# Altium PCB UltiController.PcbDoc (part 2 of 2)
Units mm, origin at the board's own origin, x right, y up, seen from the top; angles counter-clockwise.
Board outline 170 x 47 mm, 2 copper layers (Top Layer, Bottom Layer), stack 1.58 mm thick; 138 components, 71 nets, 382 pads, 231 vias.
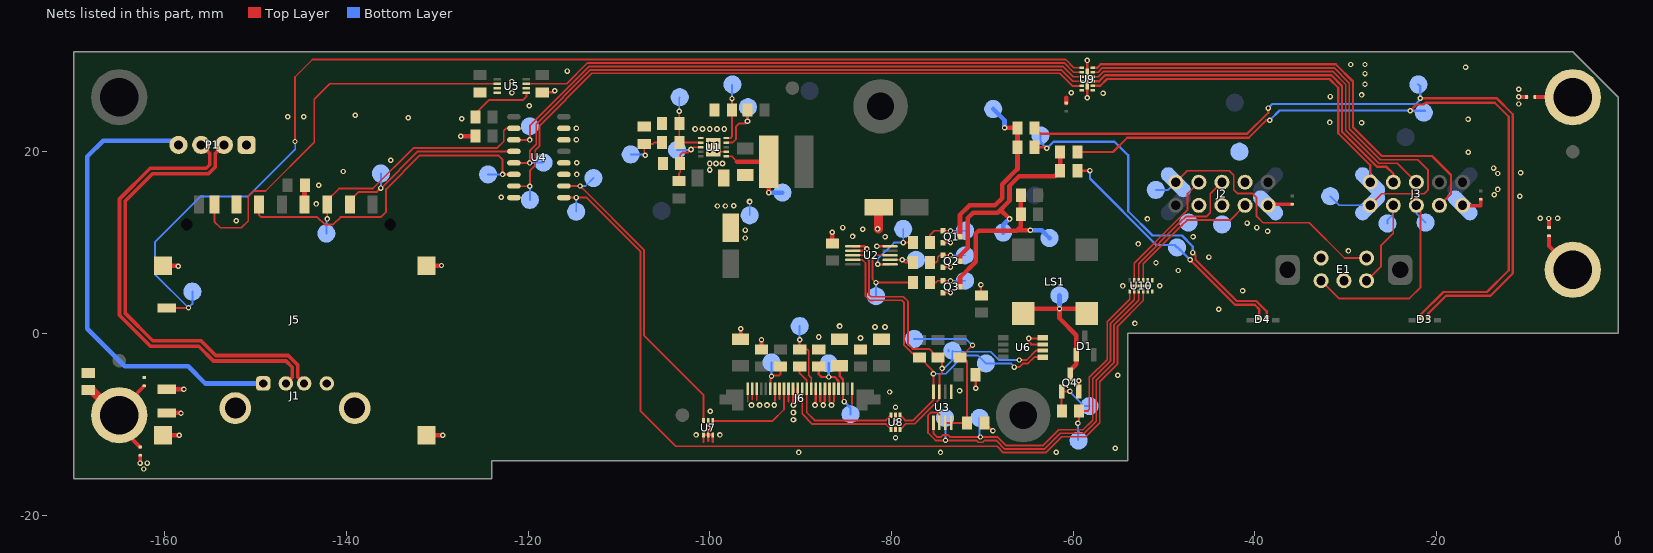
[diagram p2: the nets of this part, all layers, seen from the top]

## Via types
v1: diameter 0.6, hole 0.3, Top Layer to Bottom Layer, tented both sides, 115 vias
v2: diameter 0.6, hole 0.3, Top Layer to Bottom Layer, 72 vias
v3: diameter 0.65, hole 0.3, Top Layer to Bottom Layer, tented both sides, 40 vias
v4: diameter 0.65, hole 0.3, Top Layer to Bottom Layer, 4 vias

## Nets (pads, with @x,y where several pads share a name; then routed paths per layer and width w, separated by ;. In a path a pad name is that pad's centre, name@x,y a point inside that pad or via, vN(x,y) a via of type N, cw(c..) or ccw(c..) an arc to the next point about the centre after c; other vN are vias at no path point) (continued)
GND: C1.1 C2.1 C3.1 C4.1 C5.1 C6.2 C7.1 C8.1 C9.2 C10.1 C11.1 C12.1 C13.2 C14.1 C15.1 C16.2 C17.2 C18.1 C19.2 C20.2 D7.1 D8.1 D9.1 D10.2 D11.2 D12.2 E1.C E1.D J2.3 J2.5 J2.8 J2.9 J3.9 J5.3 J5.6 J5.11 J5.12 J5.A J5.B J5.C J5.D J6.1 J6.2 J6.3 J6.7 J6.8 J6.10 J6.11 J6.12 J6.16 J6.17 J6.18 J6.19 J6.20 J6.24 Q1.2 Q2.2 Q3.2 Q4.2 R4.1 R14.1 TP9.1 TP30.1 TP33.1 TP34.1 U1.2 U1.6 U1.11 U2.5 U2.6 U2.7 U3.1 U4.8 U4.11 U4.12 U4.14 U4.15 U5.3 U5.4 U5.6 U6.3 U6.4 U7.1 U7.2 U7.3 U7.5 U8.2 U8.5 U9.6 U9.7 U9.13 U10.5 U10.6 U10.7 U10.8 U10.13 | length 77.7
  Top Layer w0.203: U1.11@-99.1,20 U1.2@-98.2,20 ; -95.823,-7.477 J6.1@-95.823,-6.1 ; -95.323,-7.277 J6.2@-95.323,-6.1 ; -94.823,-7.323 J6.3@-94.823,-6.1 ; -92.823,-7.416 J6.7@-92.823,-6.1 ; -92.323,-7.223 J6.8@-92.323,-6.1 ; -84.323,-7.753 J6.24@-84.323,-6.1 ; Q3.2@-74.3,4.5 v1(-73.5,4.5) ; Q2.2@-74.3,7.3 v1(-73.5,7.3) ; Q1.2@-74.3,10 v1(-73.5,10) ; Q4.2@-59.375,-6.4 v1(-59.375,-5.2)
  Top Layer w0.254: J5.11@-160.375,-6.15 J5.11@-160.325,-6.2 ; J5.12@-158.85,-8.75 J5.12@-158.8,-8.8 ; -100.675,-11.925 U7.1@-100.675,-11.165 U7.2@-100.175,-11.165 ; -100.175,-11.85 U7.2@-100.175,-11.165 ; U7.5@-100.175,-9.585 v1(-100.175,-10.375) U7.2@-100.175,-11.165 ; -99.675,-11.925 U7.3@-99.675,-11.165 U7.2@-100.175,-11.165 ; -91.323,-7.477 J6.10@-91.323,-6.1 ; -90.823,-7.477 J6.11@-90.823,-6.1 ; -90.323,-7.477 J6.12@-90.323,-6.1 ; -88.323,-7.477 J6.16@-88.323,-6.1 ; -87.823,-7.477 J6.17@-87.823,-6.1 ; -87.323,-7.477 J6.18@-87.323,-6.1 ; -86.823,-7.477 J6.19@-86.823,-6.1 ; -86.323,-7.477 J6.20@-86.323,-6.1 ; U2.7@-84.25,9.1 -82.9,9.1 v1(-82.7,9.3) -83,9.6 U2.6@-84.25,9.6 ; v1(-81.6,9.6) U2.5@-80.15,9.6 ; U8.5@-79.55,-10.59 U8.2@-79.55,-9.01 ; v2(-70.725,-6.05) C15.1@-70.725,-4.55 ; C18.1@-70.15,4.25 v2(-70.15,5.35) ; C7.1@-69.775,-9.85 -68.828,-10.797 v1(-68.828,-10.726) ; U6.4@-63.375,-0.55 v2(-64.875,-0.55) -64.875,-0.925 -64.575,-1.225 U6.3@-63.325,-1.225
  Top Layer w0.3: C17.2@-118.435,26.531 -117.244,26.531 v1(-117.05,26.725) ; v2(-58.45,25.95) U9.13@-58.45,28 v2(-58.45,30.05)
  Top Layer w0.4: v2(-162.7,-14.275) D9.1@-162.7,-13.4 ; C13.2@-96.6,-0.65 v1(-96.6,0.5) ; C12.1@-94.3,-1.75 v1(-94.3,-0.7) ; J2.9@-38.54,14.225 D12.2@-35.9,14.225 ; J3.9@-17.09,14.05 -15.15,14.05 D10.2@-15.15,14.775 ; v2@-10.925,26.025 D7.1@-10.1,26.025 ; D8.1@-7.625,11.65 v2@-7.625,12.625
  Top Layer w0.5: J5.11@-159.775,-6.15 v1(-157.875,-6.15) ; v1(-127.4,21.7) -125.825,21.7 C8.1@-125.8,21.725 ; D11.2@-60.766,25.363 -60.766,25.934 ; J3.9@-17.14,14.1 J3.9@-17.09,14.05 ; v2(-10.95,26.05) v2@-10.925,26.025
  Top Layer w0.508: J5.D@-160.175,-11.2 v1(-158.4,-11.2) ; J5.C@-160.175,7.45 -158.55,7.45 v1(-158.5,7.4) ; J5.12@-159.775,-8.75 v1@-158.25,-8.75 ; J5.3@-144.6,14.2 -144.6,16.25 C14.1@-144.55,16.3 ; J5.B@-131.175,-11.2 v1(-129.4,-11.2) ; J5.A@-131.175,7.45 v1@-129.65,7.45 ; v1(-86.525,11.15) -86.525,9.925 C6.2@-86.5,9.9
  Top Layer w1: v1@-81.4,11.5 C19.2@-81.4,13.9
  Bottom Layer w0.203: TP9.1@-95.6,13 v3(-95.6,14.5)
  other v1: -79.55,-11.475 -101.5,-11.175 -98.875,-11.175 -79.55,-9.8 -158.2,-8.8 -99.95,-8.575 -79.55,-8.125 -80.2,-6.45 -129.525,7.475 -96.075,10.5 -80.7,10.65 -84.275,10.675 -96.075,11.375 -83.15,11.475 -81.525,11.5 -85.35,11.65 -152.125,12.4 -51.825,12.6 -6.675,12.675 -99.15,14.025 -98.275,14.025 -97.35,14.05 -143.325,14.25 -122.95,14.975 -13.65,15.275 -13.25,15.85 -143.05,16.3 -114.65,17.5 -13.25,17.6 -140.325,17.825 -13.725,18.2 -114.625,18.775 -135.1,19.05 -114.675,21.325 -114.675,22.575 -127.3,23.625 -133.175,23.75 -146.45,23.85 -144.675,23.85 -139.025,24.025 -119.875,25.05 -121.775,26.5 -10.95,26.875 -121.785,27.731 -115.675,28.875
  other v2: -162.3,-14.925 -161.925,-14.275 -90.2,-13.1 -74.6,-13.1 -61.85,-13.075 -55.375,-12.65 -72.5,-6.3 -55.075,-4.6 -53.2,1.1 -43.975,2.65 -41.35,4.7 -54.525,5.225 -50.475,5.25 -48.425,6.925 -50.875,7.775 -45.05,8.4 -29.7,9.075 -52.825,9.85 -46.8,10.65 -38.6,11.25 -39.775,11.65 -40.85,12.15 -7.65,12.65 -8.575,12.675 -10.825,15.1 -10.75,17.675 -16.5,19.95 -28.25,23.2 -31.75,23.225 -16.525,23.575 -10.95,25.25 -31.7,26.075 -28.25,26.25 -56.7,26.45 -60.2,26.5 -27.875,27.425 -27.875,28.6 -16.8,29.3 -29.45,29.6 -27.875,29.6
  other v3: -90.8,-9.5 -90.8,-8.7 -95.4,-7.9 -94.5,-7.9 -93.7,-7.9 -92.9,-7.9 -90.8,-7.9 -88.4,-7.9 -87.5,-7.9 -86.6,-7.9 -83.4,-0.5 -88,-0.4 -81.8,0.7 -80.7,0.7 -85.7,0.8 -100,18 -100,18.7 -99.3,18.7 -98.6,18.7 -101.6,22.5 -100.8,22.5 -100,22.5 -99.2,22.5 -98.4,22.5
  other v4: -100,20 -99.2,20 -100,21 -99.2,21
GREEN1: D3.1 R20.2 TP63.1 | length 81
  Top Layer w0.254: R20.2@-59.525,19.975 -55.6,19.975 -54.032,21.543 -40.671,21.543 -38.746,23.468 v2(-38.357,23.468) ; v2(-22.9,24.5) -22.2,25.2 -21.4,25.2 -21.2,25.4 -13.6,25.4 -12.044,23.844 -12.044,6.956 -14.431,4.569 -19.231,4.569 -21.7,2.1 D3.1@-21.7,1.7
  Bottom Layer w0.254: v2(-38.357,23.468) -37.293,24.532 -22.932,24.532 v2(-22.9,24.5) TP63.1@-21.3,24.5
GREEN2: D4.1 R21.2 TP66.1 | length 27.9
  Top Layer w0.254: R21.2@-59.525,17.9 -58.15,17.9 v1(-58.15,17.925) ; v1(-47.127,8.1) -42.17,3.143 -40.018,3.143 -39.5,2.625 D4.1@-39.5,1.7
  Bottom Layer w0.254: v1(-58.15,17.925) -58.15,17.039 -50.848,9.737 -48.837,9.737 TP66.1@-48.563,9.463 ; TP66.1@-48.527,9.5 v1(-47.127,8.1) ; TP66.1@-48.3,9.2 TP66.1@-48.2,9.2
MISO: J5.7 U5.2 | length 44.2
  Top Layer w0.2: J5.7@-154.525,14.2 -154.525,12.3 -153.85,11.625 -151.55,11.625 -150.8,12.375 -150.8,15.075 -150.2,15.675 -148.9,15.675 -143.525,21.05 -143.525,25.775 -141.819,27.481 U5.2@-123.385,27.481
MISO5: U5.7 U9.2 | length 62.5
  Top Layer w0.2: U5.7@-120.185,27.481 -115.746,27.481 -113.457,29.771 -60.981,29.771 -59.961,28.75 U9.2@-59.064,28.75
MOSI: TP37.1 U4.3 U9.3 | length 68.7
  Top Layer w0.203: U4.3@-121.55,21.305 -121.545,21.3 v1(-119.8,21.3) -119.8,22.875 -113.284,29.391 -61.139,29.391 -59.997,28.25 U9.3@-59.064,28.25
  Bottom Layer w0.203: v1(-119.8,21.3) TP37.1@-119.8,22.8
NET_SCL: TP44.1 U3.6 U10.3 | length 43.7
  Top Layer w0.203: U3.6@-74.725,-9.846 -74.725,-8.909 -74.928,-8.706 -75.653,-8.706 -75.975,-9.028 -75.975,-10.95 -75.15,-11.775 -70.644,-11.775 -70.44,-11.979 -69.96,-11.979 -69.756,-11.775 -68.486,-11.775 -67.525,-12.737 -63.173,-12.737 -61.429,-10.993 -58.757,-10.993 -57.456,-9.692 -57.456,-5.159 -55.488,-3.191 -55.488,0.951 -52.775,3.664 U10.3@-52.775,4.611
  Bottom Layer w0.203: TP44.1@-74.1,-9.3 -74.05,-9.35 v2(-74.05,-11.75)
NET_SDA: TP45.1 U3.5 U10.2 | length 38.8
  Top Layer w0.203: U3.5@-75.375,-9.846 -75.375,-11.011 -74.992,-11.394 -74.513,-11.394 -74.29,-11.171 -73.81,-11.171 -73.587,-11.394 -68.328,-11.394 -67.367,-12.356 -63.331,-12.356 -61.587,-10.612 -58.915,-10.612 -57.837,-9.534 -57.837,-5.001 -55.869,-3.033 -55.869,1.109 -53.275,3.703 U10.2@-53.275,4.611
  Bottom Layer w0.203: TP45.1@-70.3,-9.3 -70.3,-11.3 v2(-70.2,-11.4)
NetC2_2: C2.2 TP3.1 U1.5 | length 6.4
  Top Layer w0.203: U1.5@-98.2,21.5 -97.7,21.5 -97.553,21.647 -97.553,24.597 C2.2@-97.55,24.6 v1(-97.55,25.85)
  Bottom Layer w0.203: v1(-97.55,25.85) TP3.1@-97.55,27.35
NetC3_2: C3.2 R2.1 TP8.1 | length 4.7
  Top Layer w0.203: v1@-107.2,19.7 C3.2@-107.2,20.85 -106.25,20.85 -106.1,21 R2.1@-105.25,21
  Bottom Layer w0.203: TP8.1@-108.7,19.7 v1@-107.2,19.7
  other v1: -107.1,19.6
NetC4_2: C4.2 R2.2 TP7.1 U1.7 | length 7.4
  Top Layer w0.203: v1(-103.35,24.45) C4.2@-103.35,23.1 R2.2@-103.35,21 U1.7@-101,21
  Bottom Layer w0.203: v1(-103.35,24.45) -103.35,25.95 TP7.1@-103.3,26
NetC7_2: C7.2 R9.1 TP46.1 U3.7 U3.8 | length 18.7
  Top Layer w0.203: U3.7@-74.075,-9.846 U3.8@-73.425,-9.846 -73.421,-9.85 C7.2@-71.675,-9.85 -71.675,-3.051 -72.101,-2.625 R9.1@-72.4,-2.625 ; R9.1@-72.45,-2.625 R9.1@-72.4,-2.625 ; v2(-71.075,-1.3) R9.1@-72.4,-2.625
  Bottom Layer w0.203: TP46.1@-77.5,-0.6 -71.825,-0.6 -71.125,-1.3 v2(-71.075,-1.3)
NetC9_1: C9.1 J6.22 TP53.1 | length 5.8
  Top Layer w0.254: C9.1@-85.7,-3.55 -85.7,-4.7 -85.323,-5.077 J6.22@-85.323,-6.1 -85.323,-7.377 v1(-85.2,-7.5)
  Bottom Layer w0.254: v1(-85.2,-7.5) -84.5,-8.2 TP53.1@-84.5,-8.9
NetD1_1: D1.1 LS1.3 LS1.4 Q4.3 TP36.1 | length 16.7
  Top Layer w0.508: LS1.4@-65.5,2.7 v1(-61.5,2.7) ; Q4.3@-60.325,-4.5 -60.325,-4.075 -59.65,-3.4 D1.1@-59.65,-2.35 -59.65,-0.2 -61.5,1.65 v1(-61.5,2.7) ; LS1.3@-58.5,2.7 v1(-61.5,2.7)
  Bottom Layer w0.508: v1(-61.5,2.7) TP36.1@-61.5,4.2
NetD6_2: D6.2 D9.2 R28.1 SP4.1 | length 13.3
  Top Layer w0.4: SP4.1@-165.25,-9.95 D9.2@-162.7,-12.5 ; SP4.1@-165.25,-8.775 D6.2@-162.225,-5.75
  Top Layer w0.5: SP4.1@-165.25,-9.95 -165.25,-9 SP4.1@-165.25,-8.775
  Top Layer w1: R28.1@-168.4,-6.25 -168,-6.25 SP4.1@-165.25,-9
NetD7_2: D7.2 SP3.1 | length 4.2
  Top Layer w0.4: D7.2@-9.2,26.025 SP3.1@-5.025,26.025
  Top Layer w0.5: SP3.1@-5.025,26.025 SP3.1@-5,26
NetD8_2: D8.2 SP2.1 | length 4.8
  Top Layer w0.4: D8.2@-7.625,10.75 -7.625,9.625 SP2.1@-5,7
NetJ3_1: J3.1 TP43.1 U9.11 | length 58.8
  Top Layer w0.203: U9.11@-57.836,28.75 -57.25,28.75 -56.782,29.219 -31.268,29.219 -29.606,27.557 -29.606,22.532 -26.193,19.119 -22.069,19.119 -20.95,18 -20.95,15.775 -21.35,15.375 -26.025,15.375 J3.1@-27.3,14.1
  Bottom Layer w0.203: TP43.1@-31.7,15.1 -30.7,14.1 J3.1@-27.3,14.1
NetJ3_2: J3.2 U9.8 | length 39.6
  Top Layer w0.254: U9.8@-57.836,27.25 -57.026,27.25 -56.277,27.999 -31.773,27.999 -30.826,27.052 -30.826,22.027 -27.3,18.501 J3.2@-27.3,16.64
NetJ3_4: J3.4 U9.9 | length 41.7
  Top Layer w0.254: U9.9@-57.836,27.75 -57.137,27.75 -56.456,28.431 -31.594,28.431 -30.394,27.231 -30.394,22.206 -26.519,18.331 -25.5,18.331 -24.76,17.591 J3.4@-24.76,16.64
NetJ3_6: J3.6 U9.10 | length 43.9
  Top Layer w0.203: U9.10@-57.836,28.25 -57.211,28.25 -56.624,28.838 -31.426,28.838 -29.987,27.399 -29.987,22.374 -26.351,18.738 -24.318,18.738 J3.6@-22.22,16.64
NetJ3_7: J3.7 U9.12 | length 51.4
  Top Layer w0.254: U9.12@-57.836,29.25 -57.325,29.25 -56.95,29.625 -31.1,29.625 -29.2,27.725 -29.2,22.7 -26.025,19.525 -20.5,19.525 -18.4,17.425 -18.4,15.38 J3.7@-19.68,14.1
NetJ5_1: J5.1 TP54.1 U4.4 | length 22.3
  Top Layer w0.203: J5.1@-139.6,14.2 -139.6,14.625 -138.656,15.569 -136.631,15.569 v1(-136.2,16) -136.161,16 -132.126,20.035 U4.4@-121.55,20.035
  Bottom Layer w0.203: v1(-136.2,16) TP54.1@-136.2,17.6
NetJ5_2: J5.2 TP49.1 U4.2 | length 28.2
  Top Layer w0.203: v2(-142.1,12.6) J5.2@-142.1,14.2 -142.1,14.65 -140.8,15.95 -137.069,15.95 -132.603,20.416 -123.384,20.416 -122.675,21.125 -122.675,22.3 -122.4,22.575 U4.2@-121.55,22.575
  Bottom Layer w0.203: TP49.1@-142.2,11 -142.2,12.5 v2(-142.1,12.6)
NetJ5_5: J5.5 TP48.1 U4.6 | length 37.7
  Top Layer w0.203: J5.5@-149.6,14.2 -149.6,13.025 -149.375,12.8 -143.2,12.8 -142.4,12 -141.435,12 -140.635,12.8 -136.2,12.8 -135.621,13.379 -135.621,15.879 -131.9,19.6 -123.3,19.6 -122.8,19.1 v1(-122.8,17.5) -122.795,17.495 U4.6@-121.55,17.495
  Bottom Layer w0.203: TP48.1@-124.4,17.5 v1(-122.8,17.5)
NetJ6_6: J6.6 R12.1 TP50.1 | length 4.8
  Top Layer w0.203: J6.6@-93.323,-6.1 -93.323,-4.923 -93.03,-4.63 -92.33,-4.63 -92.2,-4.5 R12.1@-92.2,-3.65
  Bottom Layer w0.203: v1(-93.2,-4.7) TP50.1@-93.2,-3.2
NetJ6_9: J6.9 U7.4 | length 10.7
  Top Layer w0.203: U7.4@-99.675,-9.585 -99.635,-9.625 -93.075,-9.625 -91.823,-8.373 J6.9@-91.823,-6.1
NetJ6_13: J6.13 U8.4 | length 13.3
  Top Layer w0.203: J6.13@-89.823,-6.1 -89.823,-8.852 -88.7,-9.975 -80.575,-9.975 -80.05,-10.5 U8.4@-80.05,-10.59
NetJ6_14: J6.14 R13.1 U8.3 | length 15.2
  Top Layer w0.203: R13.1@-90.1,-3.65 -90.1,-4.4 -89.323,-5.177 J6.14@-89.323,-6.1 -89.323,-8.705 -88.453,-9.575 -80.615,-9.575 U8.3@-80.05,-9.01
NetJ6_15: J6.15 R13.2 TP51.1 | length 7.9
  Top Layer w0.203: v1(-90.1,-0.7) R13.2@-90.1,-1.75 -89.25,-1.75 -89.1,-1.9 -89.1,-2.98 -89.096,-2.984 -89.096,-4.316 -89.1,-4.32 -89.1,-4.6 -88.823,-4.877 J6.15@-88.823,-6.1
  Bottom Layer w0.203: v1(-90.1,-0.7) TP51.1@-90.1,0.8
NetJ6_21: J6.21 R14.2 TP52.1 | length 5.7
  Top Layer w0.254: R14.2@-88,-3.65 -88,-4.5 -87.7,-4.8 v1(-86.9,-4.8) -86.246,-4.8 -85.823,-5.223 J6.21@-85.823,-6.1
  Bottom Layer w0.254: v1(-86.9,-4.8) TP52.1@-86.9,-3.3
NetL1_2: L1.2 TP4.1 U1.1 | length 9.8
  Top Layer w0.203: U1.1@-98.2,19.5 -97.6,19.5 -97,18.9
  Top Layer w0.508: -97,18.9 L1.2@-93.5,18.9 v1(-93.5,15.5)
  Bottom Layer w0.508: v1(-93.5,15.5) TP4.1@-92,15.5
NetQ1_1: Q1.1 R5.2 TP18.1 | length 4.9
  Top Layer w0.203: R5.2@-75.75,10 -75.75,10.85 -75.3,11.3 Q1.1@-74.3,11.3 v1(-73.5,11.3)
  Bottom Layer w0.203: v1(-73.5,11.3) TP18.1@-71.9,11.3
NetQ1_3: Q1.3 R16.1 R17.1 TP19.1 | length 20.2
  Top Layer w0.508: Q1.3@-72.45,10.65 -72.45,13.05 -71.4,14.1 -68.6,14.1 -67.8,14.9 -67.8,16.425 -66.128,18.097 R17.1@-66.128,20.497 R16.1@-66.128,22.597 -66.181,22.65 v2(-67.55,22.65)
  Bottom Layer w0.508: TP19.1@-68.8,24.7 -67.55,23.45 v2(-67.55,22.65)
NetQ2_1: Q2.1 R6.2 TP17.1 | length 4.4
  Top Layer w0.203: R6.2@-75.75,7.8 -75.1,7.8 -74.9,8 -74.9,8.4 -74.7,8.6 Q2.1@-74.3,8.6 v1(-73.5,8.6)
  Bottom Layer w0.203: v1(-73.5,8.6) TP17.1@-71.9,8.6
NetQ2_3: Q2.3 R20.1 R21.1 TP20.1 | length 23.7
  Top Layer w0.508: Q2.3@-72.45,7.95 -72.45,8.556 -71.6,9.406 -71.6,12.7 -71,13.3 -68.3,13.3 -67,14.6 -67,16.255 -65.955,17.3 -62.025,17.3 R21.1@-61.425,17.9 R20.1@-61.425,19.975 ; -68,13.6 v1(-67,12.6)
  Bottom Layer w0.508: TP20.1@-67.7,11.1 -67.7,11.946 -67.046,12.6 v1(-67,12.6)
NetQ3_1: Q3.1 R7.2 TP16.1 | length 3.9
  Top Layer w0.203: R7.2@-75.75,5.6 -75.1,5.6 -74.9,5.8 Q3.1@-74.3,5.8 v1(-73.5,5.8)
  Bottom Layer w0.203: v1(-73.5,5.8) TP16.1@-71.9,5.8
NetQ3_3: Q3.3 R24.1 R25.1 TP21.1 | length 19.2
  Top Layer w0.508: Q3.3@-72.45,5.15 -72.45,6.15 -70.7,7.9 -70.7,11 -70.4,11.3 -66.2,11.3 -66.15,11.35 ; R25.1@-65.75,15.2 R24.1@-65.75,13.125 -65.75,11.75 -66.15,11.35 ; v2(-64.7,11.35) -66.15,11.35
  Bottom Layer w0.508: v2(-64.7,11.35) -63.45,11.35 TP21.1@-62.6,10.5
NetQ4_1: Q4.1 R8.2 TP47.1 | length 5.9
  Top Layer w0.203: R8.2@-61.25,-8.525 -61.275,-8.5 Q4.1@-61.275,-6.4 -60.425,-6.4 v1@-60.4,-6.375
  Bottom Layer w0.203: v1@-60.375,-6.4 -58.775,-8 TP47.1@-58.2,-8
  other v1: -60.35,-6.375
NetR1_1: R1.1 TP2.1 U1.4 | length 7
  Top Layer w0.203: U1.4@-98.2,21 -97.5,21 -97.1,21.4 -97.1,22.8 -96.8,23.1 -96.1,23.1 v3(-95.85,23.35) R1.1@-95.85,24.6
  Bottom Layer w0.203: v3(-95.85,23.35) TP2.1@-95.85,24.85 ; TP2.1@-95.85,25.05 TP2.1@-95.8,25.1
NetR3_1: R3.1 R4.2 TP6.1 U1.8 | length 7.1
  Top Layer w0.203: R3.1@-103.4,16.75 -103.4,17.6 -103.25,17.75 R4.2@-103.25,18.7 -103.25,19.65 -103,19.9 -102.4,19.9 v3(-102.051,20.249) -101.8,20.5 U1.8@-101,20.5
  Bottom Layer w0.203: TP6.1@-103.6,20.2 -102.1,20.2 v3(-102.051,20.249)
NetR5_1: R5.1 TP13.1 U2.1 | length 8
  Top Layer w0.203: v1(-81.5,7.6) U2.1@-80.15,7.6 ; v1(-78.7,10) R5.1@-77.65,10
  Bottom Layer w0.203: v1(-81.5,7.6) -81.5,8.2 -79.7,10 v1(-78.7,10) TP13.1@-78.7,11.5
NetR6_1: R6.1 TP14.1 U2.2 | length 4.1
  Top Layer w0.203: U2.2@-80.15,8.1 v1(-78.8,8.1) -78.5,7.8 R6.1@-77.65,7.8
  Bottom Layer w0.203: v1(-78.8,8.1) TP14.1@-77.3,8.1
NetR7_1: R7.1 TP15.1 U2.3 | length 10.4
  Top Layer w0.203: U2.3@-80.15,8.6 -81.7,8.6 -82.091,8.209 -82.091,5.991 v1(-81.7,5.6) R7.1@-77.65,5.6
  Bottom Layer w0.203: TP15.1@-81.7,4.1 v1(-81.7,5.6)
NetR8_1: R8.1 TP35.1 U10.1 | length 19.3
  Top Layer w0.203: v2(-59.475,-9.875) -59.35,-9.75 R8.1@-59.35,-8.525 -58.375,-8.525 -58.218,-8.368 -58.218,-4.843 -56.25,-2.875 -56.25,1.266 -53.775,3.741 U10.1@-53.775,4.611
  Bottom Layer w0.203: TP35.1@-59.475,-11.725 v2(-59.475,-9.875)
NetR27_1: R27.1 U5.5 | length 7.2
  Top Layer w0.2: R27.1@-125.8,23.825 -125.8,24.175 -124.277,25.698 -120.527,25.698 -120.185,26.04 U5.5@-120.185,26.481
NetTP55_1: TP55.1 U4.10 U7.6 | length 35.1
  Top Layer w0.203: U4.10@-116.05,16.225 v2(-114.275,16.225) -107.25,9.2 -107.25,-0.225 -100.675,-6.8 U7.6@-100.675,-9.585
  Bottom Layer w0.203: v2(-114.275,16.225) -113.675,16.225 TP55.1@-112.8,17.1
RED1: D3.2 R16.2 TP64.1 | length 86.3
  Top Layer w0.254: R16.2@-64.228,22.597 -63.606,21.975 -40.85,21.975 -38.525,24.3 v2(-38.525,24.8) ; v2(-21.8,25.9) -13.4,25.9 -11.613,24.113 -11.613,6.587 -14.062,4.138 -18.962,4.138 -20.9,2.2 D3.2@-20.9,1.7
  Bottom Layer w0.254: v2(-38.525,24.8) -38.075,25.25 -22.295,25.25 -21.8,25.745 -21.8,27.2 TP64.1@-22,27.4
RED2: D4.2 R17.2 TP67.1 | length 40.3
  Top Layer w0.254: R17.2@-64.228,20.497 -63.028,20.497 v2(-62.9,20.369) ; v1(-46.825,8.9) -46.523,8.598 -46.523,8.106 -41.991,3.575 -39.839,3.575 -38.7,2.436 D4.2@-38.7,1.7
  Bottom Layer w0.254: TP67.1@-63.6,21.8 -63.6,21.069 -63.028,20.497 -62.764,20.497 -62.157,21.105 -55.449,21.105 -53.943,19.599 -53.943,13.443 -51.268,10.768 -48.023,10.768 -46.825,9.57 v1(-46.825,8.9)
RESET: J2.7 U10.9 | length 15.7
  Top Layer w0.203: U10.9@-52.275,5.839 -52.275,7.647 -48.03,11.893 -47.446,12.476 -42.704,12.476 J2.7@-41.08,14.1
RESET_F: TP32.1 U4.9 U10.4 | length 100.2
  Top Layer w0.203: U4.9@-116.05,14.955 -113.555,14.955 -107.631,9.031 -107.631,-8.519 -103.725,-12.425 -68.375,-12.425 -67.682,-13.118 -63.015,-13.118 -61.271,-11.374 -58.599,-11.374 -57.075,-9.85 -57.075,-5.316 -55.107,-3.348 -55.107,0.793 -52.275,3.625 U10.4@-52.275,4.611
  Bottom Layer w0.203: TP32.1@-114.7,13.4 v1(-114.7,14.955)
S_E1: E1.B J3.3 TP42.1 | length 11.8
  Top Layer w0.203: E1.B@-27.7,5.8 -26.1,7.4 -26.1,9.7 -24.76,11.04 J3.3@-24.76,14.1
  Bottom Layer w0.203: TP42.1@-25.4,12.1 -25.4,12.46 -24.76,13.1 J3.3@-24.76,14.1
S_E2: E1.A J3.5 TP41.1 | length 23.8
  Top Layer w0.203: E1.A@-32.7,5.8 -30.75,3.85 -22.975,3.85 -21.75,5.075 -21.75,13.63 J3.5@-22.22,14.1
  Bottom Layer w0.203: J3.5@-22.22,14.1 -22.22,13.22 -22.02,13.02 TP41.1@-21.2,12.2
S_EC: E1.E J2.2 TP31.1 | length 30.2
  Top Layer w0.203: J2.2@-48.7,16.64 -47.44,17.9 -42.8,17.9 -42.325,17.425 -42.325,15.8 -41.932,15.407 -40.289,15.407 -39.8,14.919 -39.8,12.875 -39.1,12.175 -34.003,12.175 -30.128,8.3 E1.E@-27.7,8.3
  Bottom Layer w0.203: TP31.1@-50.9,15.8 -49.54,15.8 J2.2@-48.7,16.64
SCK: TP39.1 U4.7 U9.5 | length 73
  Top Layer w0.203: U4.7@-121.55,16.225 -121.525,16.2 v1(-119.8,16.2) -119.8,17.9 -119.2,18.5 -119.2,20.161 -118.719,20.642 -118.719,22.881 -112.971,28.629 -61.454,28.629 -60.075,27.25 U9.5@-59.064,27.25
  Bottom Layer w0.203: TP39.1@-119.8,14.7 v1(-119.8,16.2)
SCL3.3: R10.1 TP11.1 U2.8 U3.3 U6.2 U8.6 | length 43.2
  Top Layer w0.203: U2.8@-84.25,8.6 -83,8.6 -82.472,8.072 -82.472,4.272 -82.228,4.028 -78.688,4.028 -78.172,3.512 -78.172,-1.189 -77.661,-1.7 -75.823,-1.7 R10.1@-74.885,-2.638 -74.425,-3.098 -74.425,-4.3 -74.725,-4.6 U3.3@-74.725,-6.446 -74.725,-7.239 -77.436,-9.95 -78.41,-9.95 U8.6@-79.05,-10.59 ; v1(-65.925,-2.925) -65.125,-2.925 -64.075,-1.875 U6.2@-63.325,-1.875
  Bottom Layer w0.203: v1(-74.425,-3.85) -74.198,-3.85 -73.3,-2.952 TP11.1@-73.3,-1.9 -73.179,-2.021 -69.07,-2.021 -68.172,-2.919 -65.931,-2.919 v1(-65.925,-2.925) ; TP11.1@-73.712,-2 TP11.1@-73.712,-1.8
SCL5: J2.6 U10.10 | length 15.9
  Top Layer w0.203: U10.10@-52.775,5.839 -52.775,7.686 -48.188,12.274 -47.604,12.857 -45.343,12.857 -44.9,13.3 -44.9,15.36 J2.6@-43.62,16.64
SD_CARDDETECT: J5.10 TP40.1 U9.1 | length 128.5
  Top Layer w0.203: J5.10@-159.775,2.8 -157.4,2.8 v2(-157.375,2.825) ; v2(-145.65,21.125) -145.65,28.225 -143.725,30.15 -60.824,30.15 -59.924,29.25 U9.1@-59.064,29.25
  Bottom Layer w0.203: TP40.1@-156.95,4.6 -156.95,3.25 v2(-157.375,2.825) -161.075,6.525 -161.075,10.025 -156.025,15.075 -150.8,15.075 -145.625,20.25 -145.625,21.1 v2(-145.65,21.125)
SDA3.3: R11.1 TP10.1 U2.9 U3.4 U6.1 U8.1 | length 40.4
  Top Layer w0.203: U2.9@-84.25,8.1 -83.2,8.1 -82.853,7.753 -82.853,4.114 -82.358,3.619 -82.042,3.619 -82.014,3.647 -78.886,3.647 -78.6,3.361 -78.6,-1.3 -77.275,-2.625 R11.1@-76.912,-2.625 -75.375,-4.162 v1(-75.375,-4.435) U3.4@-75.375,-6.446 ; U8.1@-79.05,-9.01 -78.491,-9.569 -77.594,-9.569 -75.375,-7.35 U3.4@-75.375,-6.775 ; v1@-66.475,-3.687 -65.867,-3.687 -65.487,-3.306 -64.967,-3.306 -64.261,-2.6 U6.1@-63.325,-2.6
  Bottom Layer w0.203: v1(-75.375,-4.435) -74.026,-4.435 -72.016,-2.425 -70.475,-2.425 TP10.1@-69.6,-3.3 -66.875,-3.3 v1(-66.475,-3.7)
SDA5: J2.4 U10.11 | length 13.9
  Top Layer w0.203: U10.11@-53.275,5.839 -53.275,7.725 -48.345,12.655 -47.4,13.6 -47.4,15.4 J2.4@-46.16,16.64 J2.4@-46.04,16.64
SS: TP38.1 U4.5 U9.4 | length 70.9
  Top Layer w0.203: U4.5@-121.55,18.765 v1(-119.8,18.765) -119.8,20.1 -119.1,20.8 -119.1,23.038 -113.127,29.01 -61.296,29.01 -60.036,27.75 U9.4@-59.064,27.75
  Bottom Layer w0.203: v1(-119.8,18.765) -119.765,18.8 TP38.1@-118.3,18.8
USB_5V: J1.1 P1.4 | length 51.7
  Bottom Layer w0.508: P1.4@-158.35,21.2 -166.775,21.2 -168.5,19.475 -168.5,0.5 -164.375,-3.625 -157.4,-3.625 -155.515,-5.51 J1.1@-149.15,-5.51
USB_DATA_N: J1.2 P1.3 | length 50.3
  Top Layer w0.406: P1.3@-155.975,20.75 -155.03,19.805 -155.03,18.575 -155.43,18.175 -161.587,18.175 -164.96,14.803 -164.96,1.997 -161.553,-1.41 -156.253,-1.41 -154.631,-3.031 -146.644,-3.031 -145.955,-3.72 -145.955,-4.815 J1.2@-146.65,-5.51
USB_DATA_P: J1.3 P1.2 | length 50.3
  Top Layer w0.406: P1.2@-153.475,20.75 -154.42,19.805 -154.42,18.322 -155.177,17.565 -161.335,17.565 -164.35,14.55 -164.35,2.25 -161.3,-0.8 -156,-0.8 -154.379,-2.421 -146.392,-2.421 -145.345,-3.468 -145.345,-4.815 J1.3@-144.65,-5.51
USB_GND: D6.1 J1.4 J1.5 J1.6 P1.1 R28.2
pads on no net: D1.2 E1.0 Fid1. Fid2. Fid3. Fid4. H5.0 H6.0 J5.0 J5.8 J5.9 J6.0 J6.4 SP1.1 U1.9 U2.4 U4.13 U4.16
copper on no net: | length 862.1
  Top Layer w0.15: -170,-16 -124,-16 -124,-14 -54,-14 -54,0 0,0 0,26 -5,31 -170,31 -170,-16
  Bottom Layer w0.15: -170,-16 -124,-16 -124,-14 -54,-14 -54,0 0,0 0,26 -5,31 -170,31 -170,-16

## Polygon pours and split planes (outlines as drawn)
USB_GND on Top Layer "USB_GND" (solid, remove dead copper, pour order 19): -156.5,-11.8 -136.4,-11.8 -134.1,-9.5 -134.1,-5.7 -140.8,1 -157.5,1 -161.925,5.425 -161.925,11.539 -157.739,15.725 -150.9,15.725 -147.15,19.475 -147.15,30.5 -169.5,30.5 -169.5,-5.1 -157.5,-5.1 -156.5,-6.1 -157.9,-4.7 -156.5,-6.1
5V on Top Layer "Top Layer-No Net" (solid, remove dead copper, pour order 31): -33.525,15.3 -33.525,28.4 -94.5,28.4 -94.5,22 -91.9,22 -91.9,14.5 -83.1,14.5 -79.1,14.5 -79.1,7.1 -82.5,7.1 -82.5,3.9 -78.2,3.9 -78.2,-0.4 -73.425,-0.4 -73.425,-1.525 -55.753,-1.525 -55.753,9.96 -48.815,17.5 -47.723,17.517 -47.5,17.8 -47.44,17.8 -42.8,17.8 -42.4,17.4 -42.4,16.1 -41.6,15.3
GND on Top Layer "Top Layer-No Net" (solid, pour order 30): -100.684,-7.025 -100.684,-13.55 -65.1,-13.55 -71.725,-11.184 -71.725,-5.2 -72.925,-5.2 -72.925,-1.4 -78.7,-1.4 -78.7,-5.7 -81,-5.7 -81,-8.7 -84.1,-8.7 -84.1,-7.025
13V on Top Layer "Top Layer-No Net" (solid, pour order 22): -100.7,19.2 -101.5,19.2 -101.5,19.7 -102.5,19.7 -102.5,15.6 -102.7,15.4 -104.1,15.4 -104.1,13 -100.7,13
GND on Top Layer "Top Layer-No Net" (solid, pour order 29): -91.3,1.3 -91.3,-1 -88.7,-1 -88.7,-2.3 -82.7,-2.3 -82.7,-1.2 -80.2,-1.2 -80.1,-1.3 -80.1,1.3
13V on Top Layer "Top Layer-No Net" (solid, pour order 25): -91.3,3.5 -91.3,7.1 -83.2,7.1 -83.2,4.1 -82.5,3.4 -82.4,3.3 -79.2,3.3 -78.9,3 -78.9,-5.5 -82,-5.5 -82,-2.1 -79.9,-2.1 -79.9,1.5 -91.3,1.5
3.3V on Top Layer "Top Layer-No Net" (solid, pour order 24): -83.3,14.325 -83.3,12.5 -87.4,12.5 -87.4,9.2 -85.7,9.2 -85.7,7.3 -91.5,7.3 -91.5,-2.3 -95.7,-2.3 -95.7,-4.2 -99.8,-4.2 -99.8,5.3 -99.8,9.537 -95.563,9.537 -90.775,14.325
5V on Top Layer "Top Layer-No Net" (solid, pour order 23): -95.2,19.7 -96.8,19.7 -96.8,22.5 -96.6,22.7 -94.8,22.7 -94.6,22.9 -94.6,25.6 -87.3,25.6 -87.3,16 -91.9,16 -91.9,21.9 -92.1,22.1 -95,22.1 -95.2,21.9
GND on Top Layer "Top Layer-No Net" (solid, remove dead copper, pour order 27): -95.172,17.978 -96.772,17.978 -97.972,19.178 -98.572,19.178 -98.772,19.378 -98.772,21.578 -98.572,21.778 -98.072,21.778 -97.872,21.978 -97.872,23.478 -98.072,23.678 -98.172,23.678 -98.372,23.878 -98.372,25.578 -94.672,25.578 -94.672,28.378 -110.957,28.378 -113.05,30.478 -169.472,30.478 -169.472,-15.522 -124.472,-15.522 -124.472,-13.522 -98.472,-13.522 -98.472,-8.722 -99.172,-8.722 -99.172,-4.422 -99.972,-4.422 -99.972,5.478 -99.772,5.678 -90.35,14.978 -95.172,14.978
GND on Top Layer "Top Layer-No Net" (solid, pour order 28): -56.25,10.75 -52.201,14.799 -40.5,14.799 -33.175,14.799 -33.175,26.825 -55.5,26.825 -55.5,25.425 -61.2,25.425 -61.2,30.5 -55.5,30.5 -29.425,30.5 -5.2,30.5 -0.5,25.7 -0.5,0.5 -56.25,0.5
GND on Top Layer "Top Layer-No Net" (solid, pour order 38): -54.475,0.95 -54.5,0.925 -54.5,-13.5 -72.425,-13.5 -72.425,-1.4 -57.2,-1.4 -55.1,1.575
GND on Top Layer "GND" (solid, remove dead copper, pour order 40): -87.2,12.3 -79.375,12.3 -79.375,9.4 -86.275,9.4 -87.225,10.35
USB_GND on Bottom Layer "USB_GND" (solid, remove dead copper, pour order 26): -156.5,-11.8 -136.4,-11.8 -134.1,-9.5 -134.1,-5.7 -140.8,1 -157.5,1 -161.925,5.425 -161.925,11.539 -157.739,15.725 -150.9,15.725 -147.15,19.475 -147.15,30.5 -169.5,30.5 -169.5,-5.1 -157.5,-5.1 -156.5,-6.1 -157.9,-4.7 -156.5,-6.1
5V on Bottom Layer "Top Layer-No Net" (solid, pour order 32): -39.8,15.1 -37.8,15.1 -32.4,9.7 -18,9.7 -18,14.4 -17.4,15 -14.5,15 -14.5,18.5 -18.8,18.5 -18.8,16.2 -19.2,15.8 -21.8,15.8 -21.8,18.5 -39.8,18.5
13V on Bottom Layer "Top Layer-No Net" (solid, pour order 33): -104.1,12.6 -104.1,14.9 -104.05,14.95 -100.7,14.95 -100.7,14.2 -92.8,6.3 -89.5,6.3 -89.5,3.8 -95.3,3.8 -95.8,4.3
3.3V on Bottom Layer "Top Layer-No Net" (solid, remove dead copper, pour order 34): -61.425,23.9 -61.425,25.4 -61.425,30.525 -147,30.525 -147,24.596 -122.494,24.59 -122.494,29.49 -86.994,29.49 -86.994,12.49 -78.394,12.49 -77.494,11.59 -77.494,0.49 -75.294,0.49 -68.25,0.49 -68.25,2.375 -74.694,2.375 -74.694,12.49 -73.514,12.49 -73.494,12.511 -73.5,18.9 -72.7,19.7 -71.3,19.7 -66.994,19.89 -62.985,23.9
GND on Bottom Layer "Top Layer-No Net" (solid, pour order 35): -169.5,-15.5 -169.5,24.4 -152,24.4 -122.3,24.4 -122.3,29.3 -84.975,29.3 -84.975,16.625 -87.2,16.625 -87.2,12.3 -77.7,12.3 -77.7,1.3 -75.5,1.3 -75.5,0.3 -68.075,0.3 -68.075,2.575 -74.4,2.575 -74.4,12.3 -73.3,12.3 -73.302,19.7 -68.642,19.76 -61.425,26 -61.425,30.5 -17.835,30.499 -5.276,30.5 -0.5,25.724 -0.5,0.5 -54.5,0.5 -54.5,-13.5 -124.5,-13.5 -124.5,-15.5

## Other copper
Top Layer:
  rectangle net 5V: -57.05,0.554 -56.558,1.867
  rectangle net 5V: -58.425,-1.2 -57.9,-1
  rectangle net 5V: -58.45,0.1 -57.675,0.3
  rectangle net GND: -100.4,19 -98.8,22
  rectangle net GND: -99.47,-8.314 -99.101,-7.964
  rectangle net GND: -101.375,-12.14 -99.097,-11.65
  rectangle net 5V: -71.825,-0.65 -70.725,-0.425
  rectangle net 3.3V: -99.15,7.3 -95.925,7.925
  rectangle net 3.3V: -97.95,5.648 -97.437,6.475
  pour cut-out: -95.5,9.875 -99.95,9.875 -99.95,9.45 -95.5,9.45
  text "TOP" at -169.2,-15.2 h1.02
Bottom Layer:
  text "BOTTOM" at -163.5,-15.2 h1.02

## Silkscreen, mask and mechanical layers (free items; w line width, h text height)
Top Overlay:
  text "USB" at -145.5,29.95 h1 r180
  text "EXP1" at -42.3,29.9 h1.02 r180
  text "EXP2" at -20.3,29.9 h1.02 r180
  text "+" at -158.9,18.375 h1
  text "D-" at -156.606,18.347 h1
  text "D+" at -154.006,18.322 h1
  text "-" at -151.3,18.325 h1
  text "SD/USB UltiController" at -126.6,-6.9 h1.02
  text "CdB/BK/SW/RT" at -126.425,-7.525 h1.02
  text "DISPLAY" at -93.5,-12.7 h1.02
Bottom Overlay:
  drawing of 11 lines, arcs and shapes, not listed
  text "EXP1" at -45.6,29.9 h1.02 r180
  text "EXP2" at -24,29.9 h1.02 r180
  text "SD/USB UltiController" at -160.85,29.725 h1.02 r180
  text "1" at -76,15.9 h1.02
Mechanical 2:
  lines w0.1: -169.5,-15.5 -169.5,30.5 -5.276,30.5 -0.5,25.724 -0.5,0.5 -54.5,0.5 -54.5,-13.5 -124.5,-13.5 -124.5,-15.5 -169.5,-15.5
  lines w0.2: -143.05,-17.4 -143.05,-16 ; -90.073,-15.7 -90.073,-14 ; -27,0.6 -27,2
Board Outline:
  the board outline again, w0.2

## Dimensions
-170,-16 to -170,31 on Mechanical 2
0,1.4 to -54,-14 on Mechanical 2
0,0 to -170,-16 on Mechanical 2